# EAGLE board Educational-BoosterPack-RevA1-board (EAGLE 6.1)
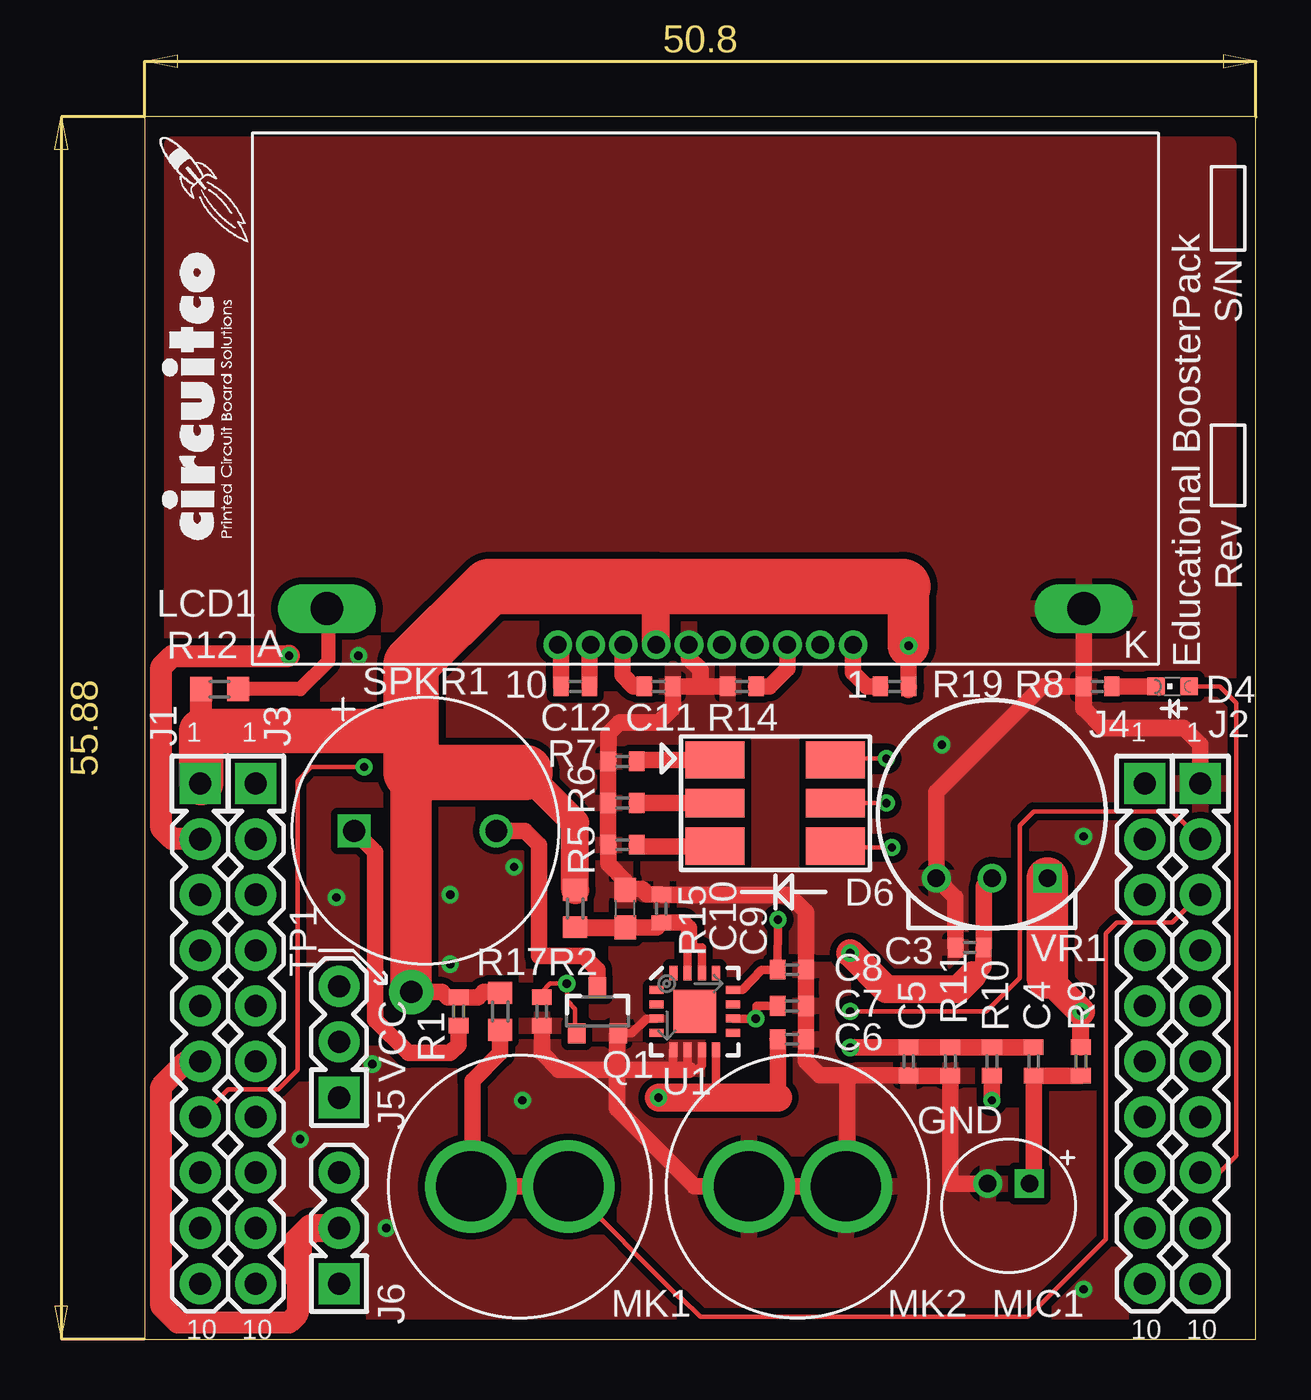
[diagram p0: board, top side]
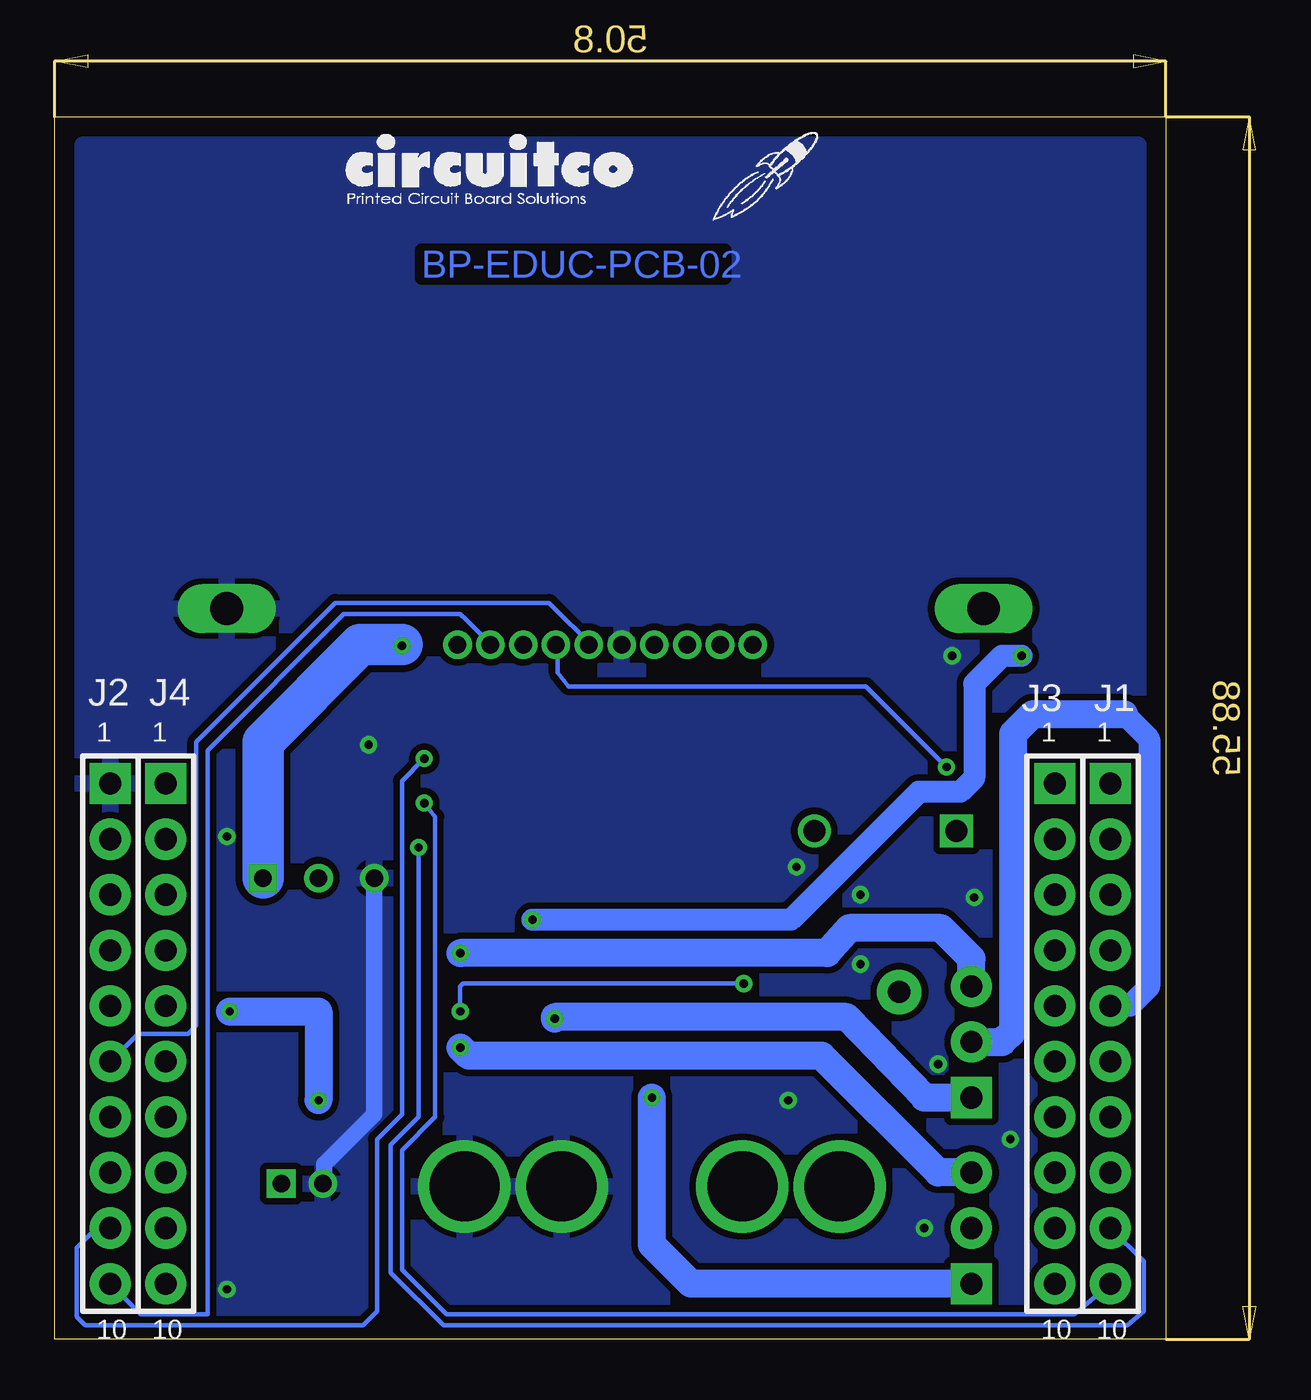
[diagram p1: board, bottom side, seen from below]

Size 50.8 x 55.88 mm. Coordinates in mm from the lower left corner, seen from the top.
Outline: 0,0 50.8,0 50.8,55.88 0,55.88 0,0
Copper layers (1*16): Top 0.035mm / dielectric 1.5mm / Bottom 0.035mm
Design rules: minimum track width 8mil, minimum drill 15mil, track to track 8mil, track to pad 8mil, pad to pad 8mil, via to via 8mil, smd to smd 8mil, copper to edge 10mil, drill to drill 8mil, minimum pad ring 10mil, minimum via ring 8mil, stop-mask expansion 4mil, vias tented up to drill 0mil, thermal gap 10mil

## Footprints (pad centres in the part's own frame; a part is rotated, then mirrored left to right if it is on the bottom)
C0402 = smd 0.7 x 0.9: 1 -0.65,0; 2 0.65,0
C0603 = smd 1.1 x 1: 1 -0.85,0; 2 0.85,0
CHIPLED_0603 = smd 0.8 x 0.8: A 0,-0.75; C 0,0.75
TRICOLOR-LED6 = smd 2.7 x 1.7: 1 -2.75,1.975; 3 -2.75,-1.975; 4 2.75,-1.975; 6 2.75,1.975 | smd 2.7 x 1.3: 2 -2.75,0; 5 2.75,0
1X10 = drill 1.016 pad 1.88 square: 1 0,10.16 | drill 1.016 pad 1.88: 2 0,7.62; 3 0,5.08; 4 0,2.54; 5 0,0; 6 0,-2.54; 7 0,-5.08; 8 0,-7.62; 9 0,-10.16; 10 0,-12.7
1X03 = drill 1.016 pad 1.88 square: 1 0,0 | drill 1.016 pad 1.88: 2 2.54,0; 3 5.08,0
GENERIC-LCD10-2 = drill 0.8 pad 1.3: 1 0,0; 2 -1.5,0; 3 -3,0; 4 -4.5,0; 5 -6,0; 6 -7.5,0; 7 -9,0; 8 -10.5,0; 9 -12,0; 10 -13.5,0 | drill 1.5 pad 2 long: LED+ -24.05,1.65; LED- 10.55,1.65
GENERIC-2PADS2 = drill 0.8 pad 1.3 square: 1 0,0.95 | drill 0.8 pad 1.3: 2 0,-0.95
MAKEYMAKEY = drill 3.2 pad 4.2: 1 0,2.225; 2 0,-2.225
SOT23-3 = smd 0.8 x 0.9: 1 -0.95,-1; 2 0.95,-1; 3 0,1.1
R0402 = smd 0.7 x 0.9: 1 -0.65,0; 2 0.65,0
R0603 = smd 1 x 1.1: 1 -0.85,0; 2 0.85,0
GENERIC-2PADS = drill 1 pad 1.5 square: 1 0,3.25 | drill 1 pad 1.5: 2 0,-3.25
TESTPOINT = drill 1.016 pad 2.032: 1 0,0
LFCSP-16 = smd 1.95 x 1.95: 0 0,0 | smd 0.65 x 0.37: 1 -1.75,0.975; 2 -1.75,0.325; 3 -1.75,-0.325; 4 -1.75,-0.975; 9 1.75,-0.975; 10 1.75,-0.325; 11 1.75,0.325; 12 1.75,0.975 | smd 0.37 x 0.65: 5 -0.975,-1.75; 6 -0.325,-1.75; 7 0.325,-1.75; 8 0.975,-1.75; 13 0.975,1.75; 14 0.325,1.75; 15 -0.325,1.75; 16 -0.975,1.75
GENERIC-3HOLES = drill 0.8 pad 1.3 square: 1 2.54,0 | drill 0.8 pad 1.3: 2 0,0; 3 -2.54,0

## Placement (x,y rotation side)
C3  .1u  [C0402]  37.72,17.91 180 top
C4  1u  [C0402]  40.64,12.7 270 top
C5  10n  [C0402]  34.92,12.7 270 top
C6  .1u  [C0402]  29.59,13.72 0 top
C7  .1u  [C0402]  29.59,15.24 0 top
C8  .1u  [C0402]  29.59,16.89 0 top
C9  .1u  [C0402]  23.62,19.68 90 top
C10  4.7u  [C0603]  21.97,19.68 90 top
C11  1u  [C0402]  23.5,29.84 0 top
C12  1u  [C0402]  19.68,29.84 180 top
D4  HSMW-CL25,WHITE  [CHIPLED_0603]  46.99,29.84 90 top
D6  CLV6A-FKB  [TRICOLOR-LED6]  28.83,24.51 0 top
E$1  [LOGO-CIRCUITCO]  2.67,43.43 90 top
E$2  [LOGO-ROCKET]  2.54,52.7 90 top
E$3  [LOGO-CIRCUITCO]  30.61,53.21 0 bottom
E$4  [LOGO-ROCKET]  18.16,53.34 0 bottom
J1  1X10  [1X10]  2.54,15.24 0 top
J2  1X10  [1X10]  48.26,15.24 0 top
J3  1X10,DNI  [1X10]  5.08,15.24 0 top
J4  1X10,DNI  [1X10]  45.72,15.24 0 top
J5  1x03  [1X03]  8.89,11.05 90 top
J6  1x03  [1X03]  8.89,2.54 90 top
LCD1  NHD-C0216CZ  [GENERIC-LCD10-2]  32.38,31.75 0 top
MIC1  CMC-5042PF-AC  [GENERIC-2PADS2]  39.5,7.11 270 top
MK1  [MAKEYMAKEY]  17.14,6.99 90 top
MK2  [MAKEYMAKEY]  29.84,6.99 90 top
Q1  BSS138  [SOT23-3]  20.7,14.99 0 top
R1  33  [R0402]  14.35,14.99 270 top
R2  2.2K  [R0402]  18.16,14.99 270 top
R5  150  [R0402]  21.84,22.61 180 top
R6  100  [R0402]  21.84,24.51 180 top
R7  100  [R0402]  21.84,26.42 180 top
R8  180  [R0402]  43.56,29.84 180 top
R9  2.2K  [R0402]  42.8,12.7 270 top
R10  100K  [R0402]  38.73,12.7 90 top
R11  47K  [R0402]  36.83,12.7 270 top
R12  15,0603  [R0603]  3.43,29.72 0 top
R14  10K  [R0402]  27.3,29.84 180 top
R15  1K,0603  [R0603]  19.68,19.68 270 top
R17  22M,0603  [R0603]  16.26,14.99 270 top
R19  10K  [R0402]  34.29,29.84 180 top
SPKR1  CEM-1203(42)  [GENERIC-2PADS]  12.83,23.24 90 top
TP1  [TESTPOINT]  12.19,15.88 0 top
U1  ADXL335  [LFCSP-16]  25.15,14.99 0 top
VR1  10K,20%  [GENERIC-3HOLES]  38.73,21.08 0 top

## Library data of the parts
C3-C12 R1 R2 R5-R12 R14 R15 R17 R19 = resistor
D4 = led
D6 E$1-E$4 J1-J6 LCD1 MIC1 MK1 MK2 Q1 SPKR1 TP1 U1 VR1 = CCo-Boost

## Nets
A0: C8.1 J1.2 U1.12
A3: J1.5 J5.2
A3_POT: C3.1 J5.3 VR1.2
A3_YOUT: C7.1 J5.1 U1.10
A4: J1.6 J6.2
A4_MIC: C4.1 C5.1 J6.3 R10.2 R11.1
A4_ZOUT: C6.1 J6.1 U1.8
GND: C3.2 C5.2 C6.2 C7.2 C8.2 C9.2 C10.2 C11.2 J2.1 LCD1.6 LCD1.LED- MIC1.2 MK2.1 MK2.2 Q1.2 R2.2 R5.2 R6.2 R7.2 R8.2 R11.2 R14.2 U1.3 U1.5 U1.6 U1.7 VR1.3
N$1: C9.1 C10.1 R15.2 U1.14 U1.15
N$2: C4.2 MIC1.1 R9.2
N$3: LCD1.LED+ R12.2
N$4: D6.2 R6.1
N$5: R1.2 SPKR1.1
N$6: Q1.3 SPKR1.2
N$7: LCD1.3 R14.1
N$8: D6.3 R5.1
N$9: D6.1 R7.1
N$10: C11.1 LCD1.8
N$11: C12.2 LCD1.10
N$12: C12.1 LCD1.9
N$13: LCD1.1 R19.2
N$16: D4.C R8.1
P2.1: D6.4 J1.9
P2.2: D6.5 J1.10
P2.3: J2.10 LCD1.2
P2.4: D6.6 J2.9
P2.5: D4.A J2.8
P2.6: J2.2 Q1.1 R2.1
P2.7: J2.3 MK1.1 MK1.2 R17.2
UCB0CLK: J1.7 LCD1.4
UCB0MOSI: J2.6 LCD1.5
VCC: J1.1 LCD1.7 R1.1 R9.1 R10.1 R12.1 R15.1 R17.1 R19.1 TP1.1 VR1.1

## Tracks (layer width: path | path; a pad name or v marks a point on that pad's centre or on a via)
A0  (via drill 0.38)
  Top 0.381: v28.96,19.18 C8.1 28.19,16.89 27.33,15.98 26.95,15.98 26.9,15.97 U1.12
  Top 1.016: J1.2 1.27,22.86 0.76,23.37 0.76,30.73 1.27,31.24 v6.6,31.24
  Bottom 1.016: v6.6,31.24 7.49,31.24 8,30.73 8.76,29.97 8.76,25.65 9.4,25.02 11.3,25.02 17.14,19.18 v28.96,19.18
A3
  Bottom 1.016: 1.91,28.57 0.76,27.43 0.76,16.13 1.65,15.24 J1.5
  Bottom 1.27: J5.2 7.49,13.59 6.99,14.1 6.99,27.69 6.1,28.57 1.91,28.57
A3_POT  (via drill 0.38)
  Top 0.762: VR1.2 38.37,20.72 C3.1 38.35,17.89 38.35,17.02 37.97,16.64 37.85,16.64
  Top 1.27: 37.85,16.64 37.21,16 33.91,16 v32.26,17.65
  Bottom 1.27: J5.3 8.89,17.4 10.29,18.8 14.48,18.8 15.49,17.65 v32.26,17.65
A3_YOUT  (via drill 0.38)
  Top 0.381: U1.10 v27.94,14.66 27.96,14.66 27.96,15.24 C7.1
  Bottom 1.27: v27.94,14.66 27.94,14.73 14.61,14.73 11.05,11.05 10.79,11.05 J5.1
A4
  Top 1.016: 6.99,2.92 6.99,1.14 6.6,0.76 1.52,0.76 0.76,1.52 0.76,11.56 1.91,12.7 J1.6
  Top 1.27: J6.2 7.62,5.08 6.99,4.45 6.99,2.92
A4_MIC  (via drill 0.38)
  Top 0.762: C4.1 R10.2 R11.1 C5.1 34.91,13.34 v32.26,13.34
  Bottom 1.27: J6.3 10.41,7.62 15.75,12.95 31.88,12.95 v32.26,13.34
A4_ZOUT  (via drill 0.38)
  Top 0.381: U1.8 26.11,13.2 26.11,11.05
  Top 0.762: 28.96,11.05 28.96,13.72 C6.1
  Top 1.27: v23.5,11.05 26.11,11.05 28.96,11.05
  Bottom 1.27: J6.1 21.72,2.54 23.5,4.32 v23.5,11.05
GND  (via drill 0.38)
  Top 0.381: 24.89,12.32 25.27,12.32 25.48,12.52 25.48,12.68 25.47,12.68 U1.7 | U1.6 24.82,12.32 | U1.5 24.16,13.22 24.16,12.32 | U1.3 22.94,14.66 22.27,13.99 Q1.2
  Top 0.762: MIC1.2 36.83,7.11 R11.2 C5.2 34.92,12.06 32.13,12.06 | 25.4,29.84 C11.2 24.14,28.97 24.13,28.96 24.13,28.83 23.5,28.19 21.72,28.19 21.21,27.69 21.21,26.43 R7.2 R6.2 R5.2 21.21,22.59 21.21,21.72 21.97,20.95 C10.2 | 25.4,29.84 R14.2 | LCD1.6 24.89,31.12 25.4,30.61 25.4,29.84 | C10.2 21.93,20.57 | LCD1.LED- 42.93,33.39 42.93,28.83 | 42.93,28.83 43.81,27.94 47.5,27.94 48.26,27.18 J2.1 | 42.93,28.83 42.91,28.84 R8.2 41.02,29.84 36.2,25.02 VR1.3 37.07,20.21 C3.2 | C10.2 22.01,20.57 22.73,20.57 22.97,20.34 C9.2 23.64,20.32 29.46,20.32 30.24,19.54 C8.2 C7.2 C6.2 30.23,13.7 30.23,12.7 30.86,12.06 32.13,12.06 | 32.13,12.06 32.13,7.05 MK2.2 MK2.1 25.15,6.99 21.59,10.54 21.59,12.32 | R2.2 18.16,13.08 18.92,12.32 21.59,12.32 | 21.59,12.32 24.16,12.32 24.82,12.32 24.89,12.32 | Q1.2 21.59,13.93 21.59,12.32
  Bottom 0.762: VR1.3 36.2,10.29 38.48,8 38.48,7.11 MIC1.2
  other vias: 11.05,5.08 8.76,20.19 42.93,22.99 13.97,20.32 17.27,10.92 16.89,21.59 36.45,27.18 42.93,2.29 7.11,9.14 9.78,31.24 13.97,17.14 10.41,12.57
  pour Top (isolate 0.305): 1.27,54.61 49.53,54.61 49.53,1.27 1.27,1.27
  pour Bottom (isolate 0.305): 1.27,54.61 49.53,54.61 49.53,1.27 1.27,1.27
N$1
  Top 0.381: 24.89,18.03 24.82,17.91 | 24.82,17.91 24.82,17.2 U1.15 | U1.14 25.48,16.79 25.48,17.91 24.82,17.91
  Top 0.762: 24.89,18.03 24.89,18.8 24.64,19.05 23.64,19.05 C9.1 23.42,18.84 C10.1 20.23,18.84 20.19,18.8 | R15.2 19.72,18.8 20.19,18.8 | 20.19,18.8 22.1,18.8
N$2
  Top 0.762: R9.2 C4.2 40.64,7.37 40.39,7.11 MIC1.1
N$3
  Top 0.635: LCD1.LED+ 8.38,33.35 8.38,30.99 7.11,29.72 R12.2
N$4
  Top 0.762: D6.2 R6.1
N$5
  Top 0.762: R1.2 14.35,13.46 13.97,13.08 12.06,13.08 10.54,14.61 10.54,22.28 SPKR1.1
N$6
  Top 0.762: SPKR1.2 16.13,23.19 16.18,23.19 16.13,23.24 17.4,23.24 18.03,22.61 18.03,17.53 20.07,17.53 20.7,16.89 Q1.3
N$7
  Top 0.762: LCD1.3 29.39,30.66 28.57,29.84 R14.1
N$8
  Top 0.762: D6.3 22.56,22.54 R5.1
N$9
  Top 0.762: D6.1 22.56,26.49 R7.1
N$10
  Top 0.762: C11.1 22.35,29.84 21.84,30.35 21.84,31.71 LCD1.8
N$11
  Top 0.762: C12.2 19.04,31.6 LCD1.10
N$12
  Top 0.762: C12.1 20.34,31.7 LCD1.9
N$13
  Top 0.762: R19.2 33.02,29.84 32.38,30.48 LCD1.1
N$16
  Top 0.762: R8.1 D4.C
P2.1  (via drill 0.38)
  Top 0.203: D6.4 31.64,22.48 v34.16,22.48
  Bottom 0.203: J1.9 1.02,3.56 1.02,1.27 1.78,0.64 33.02,0.64 35.43,3.05 35.43,8.89 34.16,10.16 v34.16,22.48
P2.2  (via drill 0.38)
  Top 0.203: D6.5 v33.91,24.51
  Bottom 0.203: J1.10 4.19,1.14 32.89,1.14 34.92,3.17 34.92,8.64 33.4,10.16 33.4,23.88 v33.91,24.51
P2.3
  Bottom 0.203: J2.10 46.86,1.14 43.81,1.14 43.81,26.92 37.59,33.15 32.26,33.15 32,32.89 30.89,31.77 | 30.89,31.77 30.86,31.75 | LCD1.2 30.89,31.77
P2.4  (via drill 0.38)
  Top 0.203: D6.6 31.64,26.54 v33.91,26.54
  Bottom 0.203: v33.91,26.54 34.92,25.53 34.92,10.29 36.07,9.14 36.07,1.27 36.7,0.64 49.4,0.64 49.78,1.02 49.78,4.19 48.9,5.08 J2.9
P2.5
  Top 0.203: D4.A 49.15,29.84 49.91,29.08 49.91,8.38 49.15,7.62 J2.8
P2.6  (via drill 0.38)
  Top 0.203: J2.2 46.99,24.13 40.64,24.13 40.01,23.5 40.01,16.51 38.48,14.99 v32.26,14.99 | 18.16,15.62 R2.1 18.16,15.88 18.54,16.26 v19.3,16.26 19.3,15.49 19.68,15.11 19.68,13.97 Q1.1
  Bottom 0.203: v32.26,14.99 32.26,16.13 32.13,16.26 v19.3,16.26
P2.7
  Top 0.203: MK1.2 24.45,1.91 24.51,1.91 25.4,1.02 40.39,1.02 41.27,1.91 43.94,4.57 43.94,18.54 44.45,19.05 46.99,19.05 J2.3
  Top 0.762: R17.2 16.26,13.08 14.99,11.81 14.99,7.05 MK1.1 MK1.2
UCB0CLK  (via drill 0.38)
  Top 0.203: J1.7 3.81,11.43 6.1,11.43 6.99,12.32 6.99,25.53 7.62,26.16 v10.03,26.16
  Bottom 0.203: v10.03,26.16 13.72,29.84 27.3,29.84 27.81,30.48 27.81,31.75 LCD1.4
UCB0MOSI
  Bottom 0.203: J2.6 46.99,13.97 44.7,13.97 44.32,14.35 44.32,27.3 37.97,33.66 28.19,33.66 27.94,33.4 26.39,31.85 LCD1.5
VCC  (via drill 0.38)
  Top 0.762: R10.1 v38.73,10.92 | TP1.1 13.59,15.88 13.84,15.62 14.34,15.62 R1.1 14.35,15.62 15.24,15.62 15.49,15.88 16.22,15.88 R17.1 | 23.39,34.71 23.37,34.42 | R19.1 34.92,29.68 v34.92,31.7 | R9.1 42.78,13.73 v42.8,14.99 42.8,14.86 R9.1
  Top 1.016: J1.1 2.58,25.44 | 2.58,27.81 R12.1
  Top 1.27: v42.8,14.99 41.27,16.51 | R15.1 19.68,23.62 17.4,25.91 | LCD1.7 23.39,34.71
  Top 1.905: 41.27,16.51 VR1.1 | TP1.1 12.19,25.91 | 34.67,34.42 34.92,34.42 v34.92,31.7
  Top 2.032: 2.58,25.44 2.58,27.81 12.19,27.81
  Top 2.54: 17.4,25.91 12.19,25.91 12.19,27.81 12.19,30.86 15.75,34.42 23.37,34.42 34.67,34.42
  Bottom 0.762: 34.92,31.75 v34.92,31.7
  Bottom 1.27: v42.8,14.99 38.73,14.99 v38.73,10.92
  Bottom 1.905: VR1.1 41.27,27.3 36.83,31.75 34.92,31.75

## Text on the board
Bottom: BP-EDUC-PCB-02
Dimension: FAB NOTES: | 1. ALL DIMENSIONS ARE IN INCHES, UNLESS | OTHERWISE NOTED | 2. THE PWB SHALL BE FABRICATED TO IPC-6012, | CLASS 2 AND WORKMANSHIP SHALL CONFORM TO | IPC-A-600, CLASS 2. CURRENT REVISIONS. | 3. BOARD MATERIAL SHALL BE 180 Tg/350 Td ISOLA FR-370HR | OR EQUIVALENT, RoHS COMPLIANT AND LEAD FREE | ASSEMBLY CAPABLE. BOARD MATERIAL SHALL | MEET OR EXCEED IPC-4101B. COLOR: NATURAL. | 4. BOARD MATERIAL & CONSTRUCTION TO BE U.L. | APPROVED AND MARKED ON THE FINISHED BOARD. | 5. MINIMUM COPPER WALL THICKNESS OF PLATED-THRU | HOLES TO BE .001 INCH, WITH A MINIMUM | ANNULAR RING OF .002 INCH. | 6. OVERALL BOARD THICKNESS TO BE .062 +/- 10% | AND APPLIES AFTER ALL LAMINATION AND PLATING | PROCESSES, MEASURED FROM COPPER TO COPPER. | 7. MAX. WARP & TWIST TO BE .0075 INCHES PER INCH. | 8. BOARD MUST BE ELECTRICALLY TESTED USING | SUPPLIED IPC-D-356 NETLIST. | 9. PLATED THROUGH SLOT INDICATED WITH MULTIPLE DRILL HITS SHOULD BE | 10. ALL VIAS TO HAVE SOLDERMASK. | FINISHED AS SMOOTH WALL BY VEDOR. | PROCESS NOTES: | 1. PLATE ALL EXPOSED AREAS WITH ELECTROLESS | IMMERSION GOLD, NICKEL 150 MICROINCHES THK MIN | GOLD 5-15 MICROINCHES THK MIN. | 2. APPLY LPI SOLDERMASK OVER BARE COPPER (SMOBC), | COLOR: RED. SOLDERMASK SHALL | CONFORM TO IPC-SM-840, CLASS H. CURRENT REV. | 3. SOLDERMASK ARTWORK HAS ZERO (0) OVERSIZED PADS. | FABRICATION VENDOR IS ALLOWED TO ADJUST THE COMPONENT | SOLDERMASK PADS TO MEET THEIR TOOLING REQUIREMENTS. | 4. APPLY LPI SILKSCREEN OR EQUIVALENT PER THE ARTWORK. | COLOR: WHITE.
tPlace: S/N | Rev | Educational BoosterPack | VCC | GND